# Altium PCB PCB版图布局及外形尺寸.PcbDoc
Units mm, origin at the board's own origin, x right, y up, seen from the top; angles counter-clockwise.
Board outline 152.4 x 101.6 mm, 2 copper layers (Top Layer, Bottom Layer); 107 components, 0 nets, 390 pads, 0 vias.
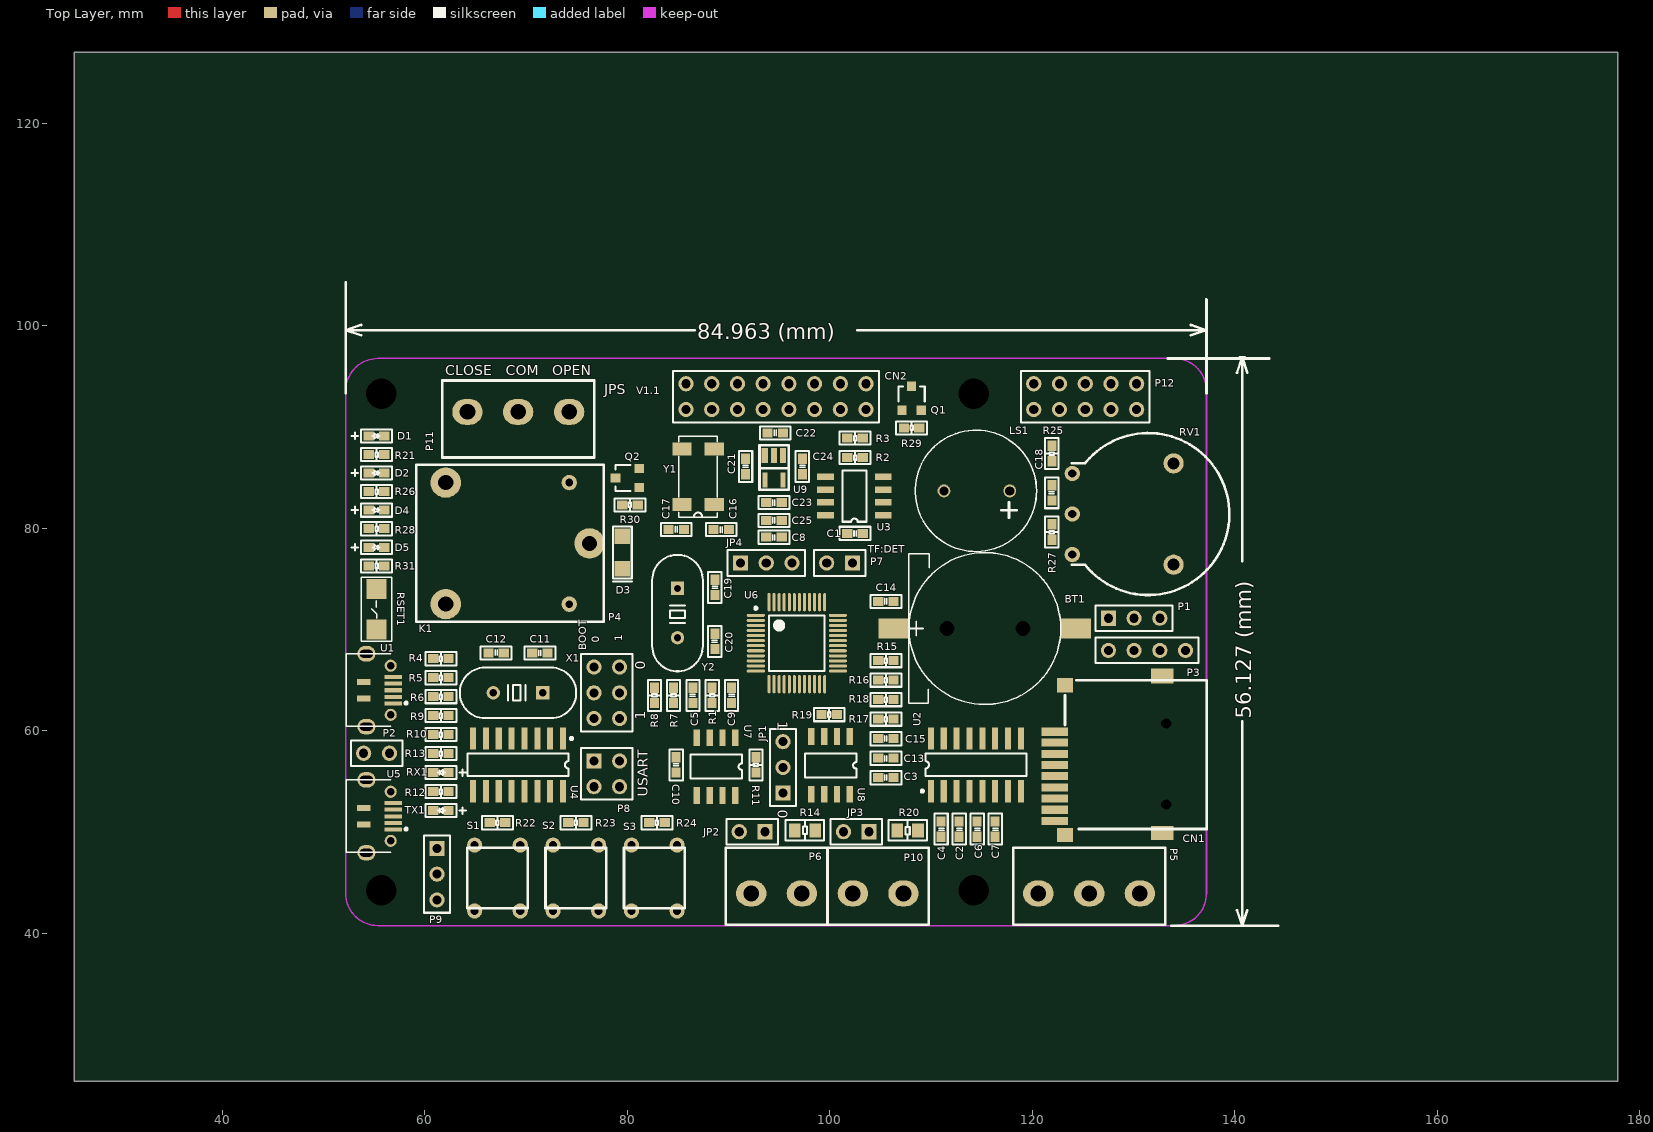
[diagram p0: Top Layer view]
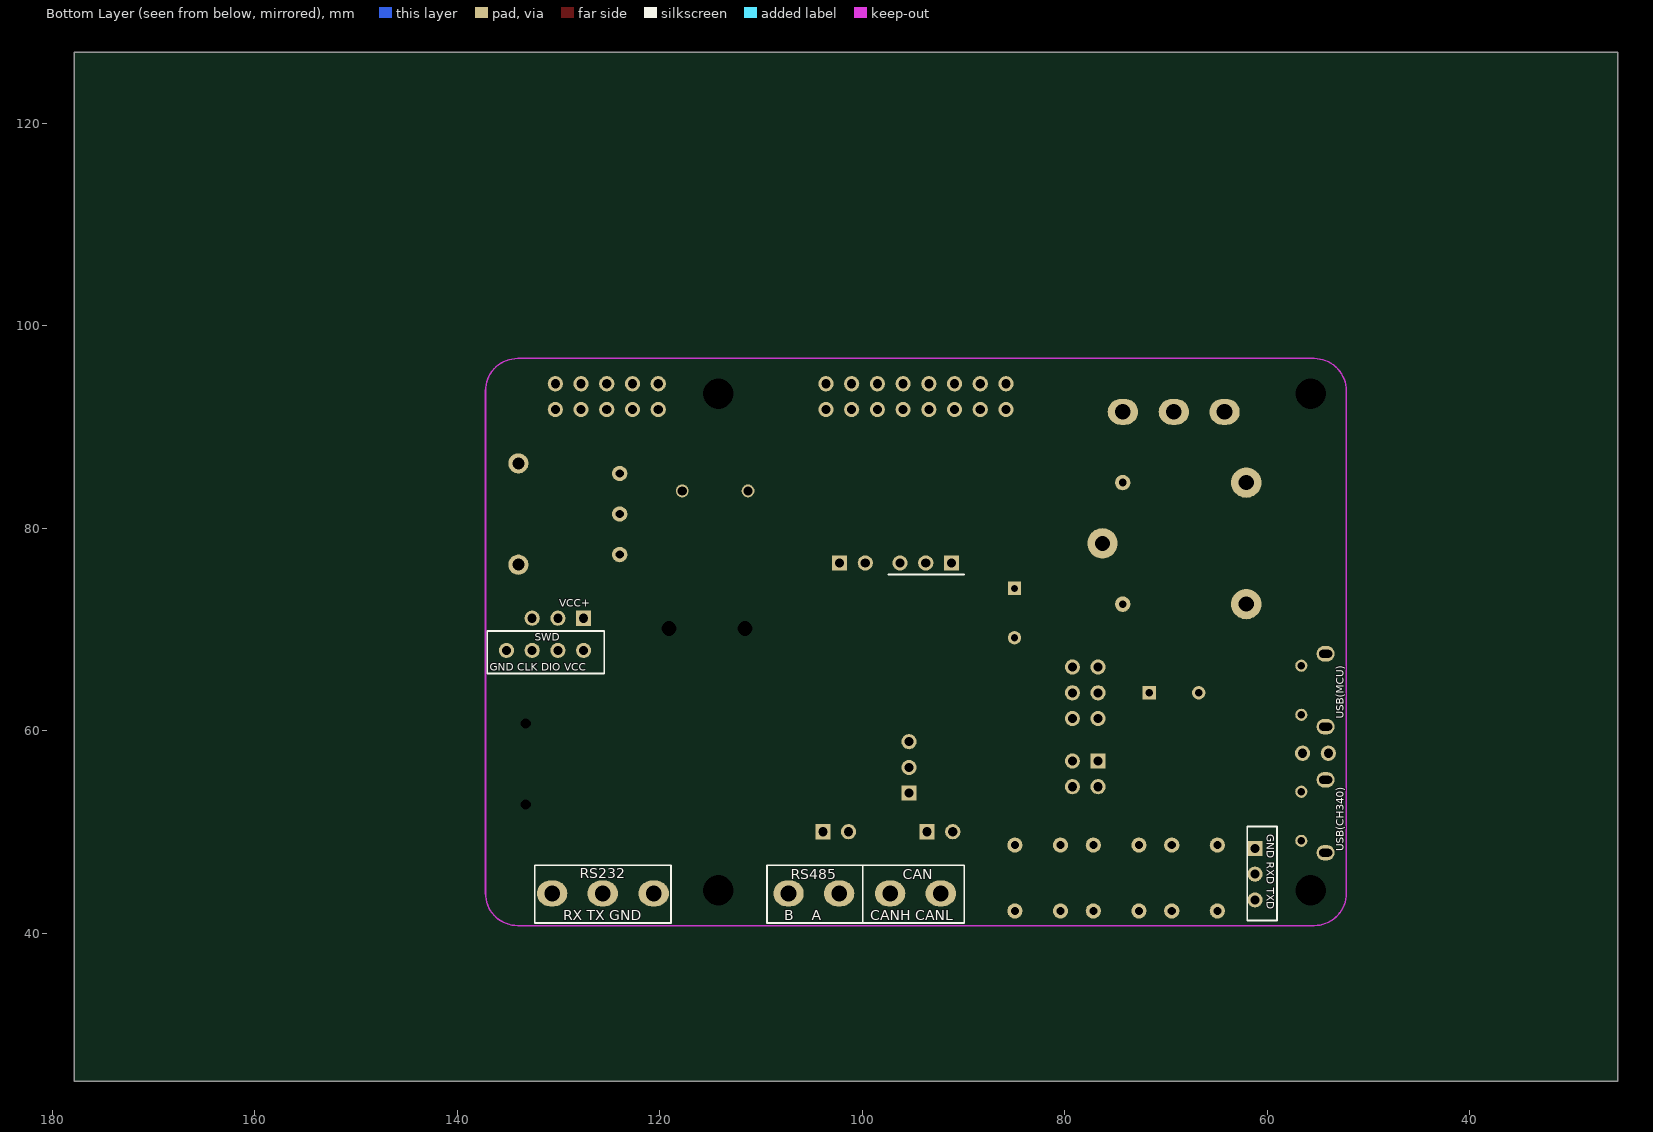
[diagram p1: Bottom Layer view, seen from below]

## Layer stack, top to bottom
Top Solder: solder mask 0.0102, Solder Resist, Dk 3.5
Top Layer: signal copper 0.0356
Dielectric 1: dielectric 0.32, FR-4, Dk 4.8
Bottom Layer: signal copper 0.0356
Bottom Solder: solder mask 0.0102, Solder Resist, Dk 3.5

## Board outline
25.4,25.4 177.8,25.4 177.8,127 25.4,127

## Design rules (kind name [scope] priority, off if disabled: settings)
Clearance [All] p1: gap=0.254
PolygonConnect [All] p1: connectstyle=Relief reliefconductorwidth=0.254 reliefentries=4 polygonreliefangle="90 Angle" airgapwidth=0.254
RoutingVias [All] p1: holewidth=0.711 width=1.27 viastyle="Through Hole" minholewidth=0.711 minwidth=1.27 maxholewidth=0.711 maxwidth=1.27
SolderMaskExpansion [All] p1: expansion=0.102
Width [All] p1: maxlimit=0.254 minlimit=0.254 preferedwidth=0.254
29 further rules are at their usual default settings.

## Components (designator, comment, footprint, x,y, rotation, side; value= is the part's Value field where it differs from the comment)
BT1 "Battery" BATTER 115.316,70.104 r0 top locked
C1 "104,0603" C0603 102.489,79.502 r0 top
C2 "104,0603" C0603 112.776,50.292 r90 top
C3 "104,0603" C0603 105.537,55.372 r180 top
C4 "104,0603" C0603 110.998,50.292 r90 top
C5 "104,0603" C0603 86.487,63.5 r270 top
C6 "104,0603" C0603 114.554,50.292 r90 top
C7 "104,0603" C0603 116.332,50.292 r90 top
C8 "104,0603" C0603 94.488,79.121 r0 top
C9 "104,0603" C0603 90.297,63.5 r90 top
C10 "104,0603" C0603 84.836,56.642 r270 top
C11 "20p,0603" C0603 71.374,67.691 r0 top
C12 "20p,0603" C0603 67.056,67.691 r180 top
C13 "104,0603" C0603 105.537,57.298 r0 top
C14 "104,0603" C0603 105.537,72.771 r180 top
C15 "104,0603" C0603 105.537,59.224 r180 top
C16 "10p,0603" C0603 89.281,79.883 r0 top
C17 "10p,0603" C0603 84.836,79.883 r180 top
C18 "103,0603" C0603 121.92,83.502 r270 top
C19 "20p,0603" C0603 88.646,74.168 r90 top
C20 "20p,0603" C0603 88.646,68.834 r270 top
C21 "105,0603" C0603 91.694,86.106 r270 top
C22 "104,0603" C0603 94.615,89.408 r180 top
C23 "223,0603" C0603 94.488,82.55 r0 top
C24 "104,0603" C0603 97.282,86.106 r90 top
C25 "106,0805" C0603 94.488,80.772 r180 top
CN1 "" TF 133.223,57.658 r180 top
CN2 "Header 8X2" HDR2X8 85.801,91.73 r0 top locked
D1 "LED0" LED0603 55.247,89.118 r180 top
D2 "LED0" LED0603 55.247,85.453 r180 top
D3 "1N4148" D1206 79.502,77.597 r270 top
D4 "LED0" LED0603 55.247,81.788 r180 top
D5 "LED0" LED0603 55.247,78.123 r180 top
JP1 "3P,2.54mm" HDR1X3 95.377,53.848 r90 top
JP2 "2P,2.54mm" HDR1X2#1 93.599,50.038 r180 top
JP3 "2P,2.54mm" HDR1X2#1 103.886,50.038 r180 top
JP4 "3P,2.54mm" HDR1X3 91.186,76.581 r0 top
K1 "SRD-5V" SRD 76.276,78.511 r180 top locked
LS1 "Speaker" SPEAKER 114.52,83.693 r180 top
P1 "Header 3" HDR1X3 127.508,71.12 r0 top
P2 "Header 2" HDR1X2#2 53.975,57.785 r0 top
P3 "SWD" HDR1X4 127.508,67.945 r0 top
P4 "Header 3X2" HDR2X3 79.248,61.214 r90 top
P5 "Header 3" 3P 125.603,43.942 r270 top
P6 "" 2P 94.742,43.942 r0 top
P7 "Header 2" HDR1X2#1 102.235,76.581 r180 top
P8 "Header 2X2" HDR2X2 76.708,57.023 r270 top
P9 "Header 3" HDR1X3 61.214,48.387 r270 top
P10 "Header 2" 2P 104.775,43.942 r0 top
P11 "Header 3" 3P 69.24,91.491 r90 top
P12 "Header 5X2" HDR2X5 120.142,91.73 r0 top
Q1 "S8050" SOT23 108.077,92.837 r0 top
Q2 "S8050" SOT23 80.01,84.963 r90 top
R1 "10k,0603" R0603 88.392,63.5 r270 top
R2 "4.7k,0603" R0603 102.489,86.995 r0 top
R3 "4.7k,0603" R0603 102.489,88.9 r0 top
R4 "22,0603" R0603 61.599,67.119 r0 top
R5 "22,0603" R0603 61.599,65.246 r0 top
R6 "1.5k,0603" R0603 61.599,63.373 r0 top
R7 "100k,0603" R0603 84.582,63.5 r270 top
R8 "100k,0603" R0603 82.677,63.5 r90 top
R9 "22,0603" R0603 61.599,61.5 r0 top
R10 "22,0603" R0603 61.599,59.626 r0 top
R11 "10k,0603" R0603 92.71,56.64 r270 top
R12 "680R,0603" R0603 61.599,54.007 r0 top
R13 "680R,0603" R0603 61.599,57.753 r0 top
R14 "120R,0805" R0805 97.536,50.165 r180 top
R15 "10k,0603" R0603 105.539,66.929 r0 top
R16 "10k,0603" R0603 105.539,65.003 r0 top
R17 "10k,0603" R0603 105.539,61.15 r0 top
R18 "10k,0603" R0603 105.539,63.077 r0 top
R19 "10k,0603" R0603 99.949,61.595 r180 top
R20 "120R,0805" R0805 107.696,50.165 r0 top
R21 "680R,0603" R0603 55.249,87.285 r0 top
R22 "10k,0603" R0603 67.183,50.927 r180 top
R23 "10k,0603" R0603 74.93,50.927 r180 top
R24 "10k,0603" R0603 82.931,50.927 r180 top
R25 "100,0603" R0603 121.92,87.376 r90 top
R26 "680R,0603" R0603 55.249,83.62 r0 top
R27 "1K,0603" R0603 121.92,79.629 r270 top
R28 "680R,0603" R0603 55.249,79.956 r0 top
R29 "10k,0603" R0603 108.077,89.916 r180 top
R30 "10k,0603" R0603 80.264,82.296 r180 top
R31 "680R,0603" R0603 55.249,76.291 r0 top
RSET1 "" 5032-S 55.245,72.009 r180 top
RV1 "10K,RV09" B503 131.445,81.407 r270 top
RX1 "LED" LED0603 61.597,55.88 r0 top
S1 "SW-PB" ? 67.183,45.466 r90 top
S2 "SW-PB" ? 74.93,45.466 r90 top
S3 "SW-PB" ? 82.677,45.466 r90 top
TX1 "LED" LED0603 61.597,52.133 r0 top
U1 "USB-mrico" MICROUSB-B 56.642,64.008 r270 top
U2 "MAX3232ECAE" SOP16M 114.427,56.642 r0 top
U3 "AT24C08" SOP-8 105.283,81.28 r180 top
U4 "CH340G" SOP16M 69.215,56.642 r180 top
U5 "USB-mrico" MICROUSB-B 56.642,51.562 r270 top
U6 "STM32F103C8T6" LQFP48 96.749,68.656 r0 top locked
U7 "SN65HVD230" SOP-8 90.678,59.309 r270 top
U8 "SP3485" SOP-8 101.981,59.436 r270 top
U9 "RT9193" SOT-23-5 94.488,85.979 r180 top
X1 "12MHz,49s" XL 69.215,63.754 r180 top
Y1 "32.768K" MC-306 86.995,85.09 r90 top
Y2 "8MHz" XL 84.963,71.628 r270 top
? "Comment" KONG 114.197,93.267 r0 top
? "Comment" KONG 55.697,93.267 r0 top
? "Comment" KONG 55.697,44.267 r0 top
? "Comment" KONG 114.197,44.267 r0 top

## Footprints (in the part's own frame and the unit in brackets; to place one, negate y for a bottom-side part, rotate by r counter-clockwise, add the part's x,y. Pads: shape width x height; smd on the part's side, far side on the other; paste and mask are expansions set on the pad)
2P [mm]
  oval 3x2.54 hole 1.54: 1(-2.5,0) 2(2.5,0)
  silkscreen extent -5,-3.1 5,4.5
3P [mm]
  oval 2.54x3 hole 1.54: 1(0,5.017) 2(0,0.017) 3(0,-5.016)
  silkscreen extent -4.5,-7.5 3.1,7.52
5032-S [mm]
  rect 2x2 smd: 1(0,2) 2(0,-2)
  silkscreen extent -1.5,-3.18 1.5,3.18
B503 [mm]
  round 2 hole 1.2: 0(-5,2.5) 0(5,2.5)
  round 1.524 hole 0.8: 1(-4,-7.5) 2(0,-7.5) 3(4,-7.5)
  silkscreen extent -8,-7.53 8,8
BATTER [mm]
  rect 3x2 smd: 1(-9,0) 2(9,0)
  round 0 hole 1.5: ""(-3.75,0) ""(3.75,0)
  silkscreen extent -7.5,-7.5 7.5,7.5
C0603 [mil]
  rect 40x35 smd: 1(-29.92,0) 2(29.92,0)
  silkscreen extent -60,-26 60,26
D1206 [mm]
  rect 1.524x1.5 smd: 1(-1.6,0) 2(1.6,0)
  silkscreen extent -2.57,-0.91 2.84,0.94
HDR1X2#1 [mm] "Connector; Header; 2 Position"
  rect 1.5x1.5 hole 0.9: 1(0,0)
  round 1.5 hole 0.9: 2(2.54,0)
  silkscreen extent -1.27,-1.27 3.81,1.27
HDR1X2#2 [mm] "Connector; Header; 2 Position"
  round 1.5 hole 0.9: 1(0,0) 2(2.54,0)
  silkscreen extent -1.27,-1.27 3.81,1.27
HDR1X3 [mm] "Connector; Header; 3 Position"
  rect 1.5x1.5 hole 0.9: 1(0,0)
  round 1.5 hole 0.9: 2(2.54,0) 3(5.08,0)
  silkscreen extent -1.27,-1.27 6.35,1.27
HDR1X4 [mm] "Connector; Header; 4 Position"
  round 1.5 hole 0.9: 1(0,0) 2(2.54,0) 3(5.08,0) 4(7.62,0)
  silkscreen extent -1.27,-1.27 8.89,1.27
HDR2X2 [mm] "Connector; Header; 2x2 Position"
  rect 1.5x1.5 hole 0.9: 1(0,0)
  round 1.5 hole 0.9: 2(0,2.54) 3(2.54,0) 4(2.54,2.54)
  silkscreen extent -1.27,-1.27 3.81,3.81
HDR2X3 [mm] "Connector; Header; 3x2 Position"
  round 1.5 hole 0.9: 1(0,0) 2(0,2.54) 3(2.54,0) 4(2.54,2.54) 5(5.08,0) 6(5.08,2.54)
  silkscreen extent -1.27,-1.27 6.35,3.81
HDR2X5 [mm] "Connector; Header; 5x2 Position"
  round 1.5 hole 0.9: 1(0,0) 2(0,2.54) 3(2.54,0) 4(2.54,2.54) 5(5.08,0) 6(5.08,2.54) 7(7.62,0) 8(7.62,2.54) 9(10.16,0) 10(10.16,2.54)
  silkscreen extent -1.27,-1.27 11.43,3.81
HDR2X8 [mm] "Connector; Header; 8x2 Position"
  round 1.5 hole 0.9: 1(0,0) 2(0,2.54) 3(2.54,0) 4(2.54,2.54) 5(5.08,0) 6(5.08,2.54) 7(7.62,0) 8(7.62,2.54) 9(10.16,0) 10(10.16,2.54) 11(12.7,0) 12(12.7,2.54) 13(15.24,0) 14(15.24,2.54) 15(17.78,0) 16(17.78,2.54)
  silkscreen extent -1.27,-1.27 19.05,3.81
KONG [mm]
  round 0 hole 3 mask+3: 1(0,0)
LED0603 [mil]
  rect 40x35 smd: 1(29.92,0) 2(-29.92,0)
  silkscreen extent -60,-26 97,26
LQFP48 [mm]
  oval 1.8x0.3 smd: 1(-4.05,2.75) 2(-4.05,2.25) 3(-4.05,1.75) 4(-4.05,1.25) 5(-4.05,0.75) 6(-4.05,0.25) 7(-4.05,-0.25) 8(-4.05,-0.75) 9(-4.05,-1.25) 10(-4.05,-1.75) 11(-4.05,-2.25) 12(-4.05,-2.75) 25(4.05,-2.75) 26(4.05,-2.25) 27(4.05,-1.75) 28(4.05,-1.25) 29(4.05,-0.75) 30(4.05,-0.25) 31(4.05,0.25) 32(4.05,0.75) 33(4.05,1.25) 34(4.05,1.75) 35(4.05,2.25) 36(4.05,2.75)
  oval 0.3x1.8 smd: 13(-2.75,-4.05) 14(-2.25,-4.05) 15(-1.75,-4.05) 16(-1.25,-4.05) 17(-0.75,-4.05) 18(-0.25,-4.05) 19(0.25,-4.05) 20(0.75,-4.05) 21(1.25,-4.05) 22(1.75,-4.05) 23(2.25,-4.05) 24(2.75,-4.05) 37(2.75,4.05) 38(2.25,4.05) 39(1.75,4.05) 40(1.25,4.05) 41(0.75,4.05) 42(0.25,4.05) 43(-0.25,4.05) 44(-0.75,4.05) 45(-1.25,4.05) 46(-1.75,4.05) 47(-2.25,4.05) 48(-2.75,4.05)
  silkscreen extent -4.17,-2.75 2.75,3.57, body extent -3.5,-3.5 3.5,3.5, height 1.6
MC-306 [mm]
  rect 1.3x1.9 smd: 1(-2.75,-1.6) 2(2.75,-1.6) 3(2.75,1.6) 4(-2.75,1.6)
  silkscreen extent -4,-1.9 4,1.9
MICROUSB-B [mm]
  oval 1.54x1.8 hole 0.762 slot 1.3 at 90 deg: 0(-3.6,-2.4)
  round 1.2 hole 0.762: 0(-2.425,0) 0(2.425,0)
  rect 0.6x1.35 smd: 0(-0.8,-2.65) 0(0.8,-2.65)
  oval 1.524x1.8 hole 0.762 slot 1.3 at 90 deg: 0(3.6,-2.4)
  rect 0.4x1.7 smd: 1(1.3,0.25) 2(0.65,0.25) 3(0,0.25) 4(-0.65,0.25) 5(-1.3,0.25)
  silkscreen extent -3.6,-4.4 3.56,1.65
R0603 [mil]
  rect 40x35 smd: 1(-29.92,0) 2(29.92,0)
  silkscreen extent -60,-26 60,26
R0805 [mil]
  rect 45x55 smd: 1(-40,0) 2(40,0)
  silkscreen extent -75,-40 75,40
SOP16M [mm]
  rect 0.6x2.2 smd: 1(-4.445,-2.6) 2(-3.175,-2.6) 3(-1.905,-2.6) 4(-0.635,-2.6) 5(0.635,-2.6) 6(1.905,-2.6) 7(3.175,-2.6) 8(4.445,-2.6) 9(4.445,2.6) 10(3.175,2.6) 11(1.905,2.6) 12(0.635,2.6) 13(-0.635,2.6) 14(-1.905,2.6) 15(-3.175,2.6) 16(-4.445,2.6)
  silkscreen extent -5.42,-2.72 5,1.1
SOP-8 [mil]
  rect 65x25 smd: 1(0,0) 2(0,-50) 3(0,-100) 4(0,-150) 5(224.41,-150) 6(224.41,-100) 7(224.41,-50) 8(224.41,0)
  silkscreen extent 65,-175 159,25
SOT23 [mm]
  rect 0.9x0.95 smd: 1(0,1.175) 2(-0.95,-1.175) 3(0.95,-1.175)
  silkscreen extent -1.3,-0.3 1.3,1.18
SOT-23-5 [mm]
  rect 0.6x1.5 smd: 1(-0.9,-1.2) 2(0,-1.2)
  rect 0.63x1.5 smd: 3(0.9,-1.2)
  rect 0.5x1.5 smd: 4(0.9,1.2) 5(-0.9,1.2)
  silkscreen extent -1.47,-2.21 1.43,2.18
SPEAKER [mil]
  round 50 hole 35: 1(-127.92,0) 2(127.92,0)
  silkscreen extent -232,-236 240,236
SRD [mm]
  round 3 hole 1.5: 1(0,0) 2(14.2,6) 3(14.2,-6)
  round 1.524 hole 0.762: 4(2,6) 5(2,-6)
  silkscreen extent -1.4,-7.75 17.1,7.75
TF [mm]
  rect 2.6x0.85 smd: 1(11,-2.25)
  rect 2.6x0.8 smd: 2(11,-1.172) 3(11,-0.069) 4(11,1.034) 5(11,2.137) 6(11,3.241) 7(11,4.344) 8(11,5.447) 9(11,6.55)
  round 0 hole 1: 11(0,-3.05) 12(0,4.95)
  rect 1.6x1.4 smd: G1(10,7.95) G4(10,-6.85)
  rect 2.2x1.5 smd: G2(0.4,-7.75)
  rect 2.2x1.4 smd: G3(0.4,7.75)
  silkscreen extent -4,-7.35 10,7.35
XL [mil]
  rect 52x52 hole 28: 1(-96.06,0)
  round 52 hole 28: 2(96.06,0)
  silkscreen extent -226,-98 226,98
? [mm]
  round 1.5 hole 0.8: 1(-3.25,-2.25) 1(3.25,-2.25) 2(-3.25,2.25) 2(3.25,2.25)
  silkscreen extent -3,-3 3,3

## Part data
BT1: "Multicell Battery"
C1 C2 C3 C4 C5 C6 C7 C8 C9 C14 C15 C16 C17 C19 C20 C21 C22 C23 C24 C25: library part Cap, "Capacitor"
C10 C11 C12 C13 C18: library part CAP, "Capacitor"
CN1: library part SMS016AFA5E
CN2: "Header, 8-Pin, Dual row"
D1 D2 D4 D5: "Typical INFRARED GaAs LED"
D3: library part "Diode 1N4148", "High Conductance Fast Diode"
JP1 JP4: library part Jumper3
JP2 JP3: library part JP2
K1: library part Relay-SPDT, "Single-Pole Dual-Throw Relay"
LS1: "Loudspeaker"
P1 P5 P9 P11: "Header, 3-Pin"
P2 P7 P10: "Header, 2-Pin"
P3: library part "Header 4", "Header, 4-Pin"
P4: "Header, 3-Pin, Dual row"
P6: library part "Header 2", "Header, 2-Pin"
P8: "Header, 2-Pin, Dual row"
P12: "Header, 5-Pin, Dual row"
Q1 Q2: library part NPN, "NPN Bipolar Transistor"
R1 R2 R3 R4 R5 R6 R7 R8 R9 R10 R12 R13 R15 R16 R17 R18 R19 R20 R21 R22 R23 R24 R25 R26 R27 R28 R29 R30 R31: library part Res1, "Resistor"
R11 R14: library part res1, "Resistor"
RSET1: library part SW-PB_V, "SWITCH"
RV1: library part RV
S1 S2 S3: "Switch"
U1 U5: library part usb-STM
U2: "?5kV ESD-Protected, 3.0V to 5.5V, Low-Power, up to 250kbps, True RS-232 Transceiver"
U3: library part ST24C08RB5, "Serial 8K (1K x 8) EEPROM"
U4: "USB to TTL Serial / UART"
U7: library part SN65HVD230D
U8: library part SP3458
U9: library part RT9193X_5P
X1: library part CRYSTAL, "Crystal"
Y1 Y2: library part XTAL, "Crystal Oscillator"

## Nets (pads, with @x,y where several pads share a name; then routed paths per layer and width w, separated by ;. In a path a pad name is that pad's centre, name@x,y a point inside that pad or via, vN(x,y) a via of type N, cw(c..) or ccw(c..) an arc to the next point about the centre after c; other vN are vias at no path point)
pads on no net: ?.1 BT1. BT1.1 BT1.2 C1.1 C1.2 C2.1 C2.2 C3.1 C3.2 C4.1 C4.2 C5.1 C5.2 C6.1 C6.2 C7.1 C7.2 C8.1 C8.2 C9.1 C9.2 C10.1 C10.2 C11.1 C11.2 C12.1 C12.2 C13.1 C13.2 C14.1 C14.2 C15.1 C15.2 C16.1 C16.2 C17.1 C17.2 C18.1 C18.2 C19.1 C19.2 C20.1 C20.2 C21.1 C21.2 C22.1 C22.2 C23.1 C23.2 C24.1 C24.2 C25.1 C25.2 CN1.1 CN1.2 CN1.3 CN1.4 CN1.5 CN1.6 CN1.7 CN1.8 CN1.9 CN1.11 CN1.12 CN1.G1 CN1.G2 CN1.G3 CN1.G4 CN2.1 CN2.2 CN2.3 CN2.4 CN2.5 CN2.6 CN2.7 CN2.8 CN2.9 CN2.10 CN2.11 CN2.12 CN2.13 CN2.14 CN2.15 CN2.16 D1.1 D1.2 D2.1 D2.2 D3.1 D3.2 D4.1 D4.2 D5.1 D5.2 JP1.1 JP1.2 JP1.3 JP2.1 JP2.2 JP3.1 JP3.2 JP4.1 JP4.2 JP4.3 K1.1 K1.2 K1.3 K1.4 K1.5 LS1.1 LS1.2 P1.1 P1.2 P1.3 P2.1 P2.2 P3.1 P3.2 P3.3 P3.4 P4.1 P4.2 P4.3 P4.4 P4.5 P4.6 P5.1 P5.2 P5.3 P6.1 P6.2 P7.1 P7.2 P8.1 P8.2 P8.3 P8.4 P9.1 P9.2 P9.3 P10.1 P10.2 P11.1 P11.2 P11.3 P12.1 P12.2 P12.3 P12.4 P12.5 P12.6 P12.7 P12.8 P12.9 P12.10 Q1.1 Q1.2 Q1.3 Q2.1 Q2.2 Q2.3 R1.1 R1.2 R2.1 R2.2 R3.1 R3.2 R4.1 R4.2 R5.1 R5.2 R6.1 R6.2 R7.1 R7.2 R8.1 R8.2 R9.1 R9.2 R10.1 R10.2 R11.1 R11.2 R12.1 R12.2 R13.1 R13.2 R14.1 R14.2 R15.1 R15.2 R16.1 R16.2 R17.1 R17.2 R18.1 R18.2 R19.1 R19.2 R20.1 R20.2 R21.1 R21.2 R22.1 R22.2 R23.1 R23.2 R24.1 R24.2 R25.1 R25.2 R26.1 R26.2 R27.1 R27.2 R28.1 R28.2 R29.1 R29.2 R30.1 R30.2 R31.1 R31.2 RSET1.1 RSET1.2 RV1.0 RV1.1 RV1.2 RV1.3 RX1.1 RX1.2 S1.1 S1.2 S2.1 S2.2 S3.1 S3.2 TX1.1 TX1.2 U1.0 U1.1 U1.2 U1.3 U1.4 U1.5 U2.1 U2.2 U2.3 U2.4 U2.5 U2.6 U2.7 U2.8 U2.9 U2.10 U2.11 U2.12 U2.13 U2.14 U2.15 U2.16 U3.1 U3.2 U3.3 U3.4 U3.5 U3.6 U3.7 U3.8 U4.1 U4.2 U4.3 U4.4 U4.5 U4.6 U4.7 U4.8 U4.9 U4.10 U4.11 U4.12 U4.13 U4.14 U4.15 U4.16 U5.0 U5.1 U5.2 U5.3 U5.4 U5.5 U6.1 U6.2 U6.3 U6.4 U6.5 U6.6 U6.7 U6.8 U6.9 U6.10 U6.11 U6.12 U6.13 U6.14 U6.15 U6.16 U6.17 U6.18 U6.19 U6.20 U6.21 U6.22 U6.23 U6.24 U6.25 U6.26 U6.27 U6.28 U6.29 U6.30 U6.31 U6.32 U6.33 U6.34 U6.35 U6.36 U6.37 U6.38 U6.39 U6.40 U6.41 U6.42 U6.43 U6.44 U6.45 U6.46 U6.47 U6.48 U7.1 U7.2 U7.3 U7.4 U7.5 U7.6 U7.7 U7.8 U8.1 U8.2 U8.3 U8.4 U8.5 U8.6 U8.7 U8.8 U9.1 U9.2 U9.3 U9.4 U9.5 X1.1 X1.2 Y1.1 Y1.2 Y1.3 Y1.4 Y2.1 Y2.2

## Keep-outs
Keep-Out Layer:
  lines w0.152: 52.197,43.947 ccw(c55.377,43.947) 55.377,40.767 134.017,40.767 ccw(c134.017,43.947) 137.197,43.947 137.197,93.587 ccw(c134.017,93.587) 134.017,96.767 55.377,96.767 ccw(c55.377,93.587) 52.197,93.587 52.197,43.947

## Silkscreen, mask and mechanical layers (free items; w line width, h text height)
Top Overlay:
  lines w0.254: 52.197,93.345 52.197,104.267 ; 52.197,99.314 52.197,99.822 ; 53.721,99.06 52.197,99.568 ; 53.721,100.076 52.197,99.568 ; 86.655,99.568 52.197,99.568 ; 102.702,99.568 137.16,99.568 ; 133.35,96.767 143.376,96.767 143.383,96.774 ; 133.731,40.767 143.383,40.767 144.272,40.767 ; 135.636,99.06 137.16,99.568 ; 135.636,100.076 137.16,99.568 ; 137.16,99.314 137.16,99.822 ; 137.16,102.616 137.197,102.579 137.197,93.345 ; 140.208,42.291 140.716,40.767 ; 140.208,95.37 140.716,96.894 ; 140.462,40.767 140.97,40.767 ; 140.462,96.894 140.97,96.894 ; 140.716,60.934 140.716,40.767 ; 140.716,76.727 140.716,96.894 ; 141.224,42.291 140.716,40.767 ; 141.224,95.37 140.716,96.894
  text "84.963 (mm)" at 86.909,98.654 h1.52
  text "CLOSE" at 62.052,95.098 h1.02
  text "COM" at 68.021,95.098 h1.02
  text "OPEN" at 72.619,95.098 h1.02
  text "JPS" at 77.724,93.218 h1.02
  text "V1.1" at 80.899,93.218 h0.76
  text "TF:DET" at 103.759,77.597 h0.76
  text "1" at 79.502,68.834 h0.76 r90
  text "0" at 77.216,68.707 h0.76 r90
  text "BOOT" at 75.946,67.945 h0.76 r90
  text "0" at 81.788,66.04 h1.02 r90
  text "56.127 (mm)" at 141.63,61.188 h1.52 r90
  text "1" at 81.788,61.087 h1.02 r90
  text "1" at 94.869,60.96 h1.02 r270
  text "USART" at 82.042,53.467 h1.02 r90
  text "0" at 94.869,52.197 h1.02 r270
Bottom Overlay:
  lines w0.178: 89.916,75.438 97.409,75.438 ; 99.949,41.021 99.949,46.736 ; 99.949,41.021 109.41,41.021 109.41,46.736 99.949,46.736 ; 99.949,41.021 89.927,41.021 89.927,46.736 99.949,46.736 ; 59.055,41.275 59.055,50.546 61.976,50.546 61.976,41.275 59.055,41.275 ; 118.872,41.021 132.334,41.021 132.334,46.736 131.064,46.736 118.872,46.736 118.872,41.021 ; 125.476,65.659 125.476,69.85 137.033,69.85 137.033,65.659 125.476,65.659
  text "VCC+" at 129.921,72.263 h0.76
  text "SWD" at 132.333,68.898 h0.76
  text "GND CLK DIO VCC" at 136.779,65.913 h0.76
  text "USB(MCU)" at 52.451,61.214 h0.76 r270
  text "GND RXD TXD" at 60.071,49.784 h0.76 r90
  text "USB(CH340)" at 52.451,48.133 h0.76 r270
  text "RS232" at 127.889,45.466 h1.02
  text "CAN" at 96.012,45.339 h1.02
  text "RS485" at 107.061,45.339 h1.02
  text "CANH CANL" at 99.187,41.275 h1.02
  text "B    A" at 107.696,41.275 h1.02
  text "RX TX GND" at 129.54,41.275 h1.02